# Altium PCB X1000_BB_Halley2.PcbDoc
Units mil, origin at the board's own origin, x right, y up, seen from the top; angles counter-clockwise.
Board outline 3000 x 3000 mil, 2 copper layers (Top Layer, Bottom Layer), stack 12.8 mil thick; 72 components, 102 nets, 488 pads, 0 vias.
Unrouted connection lines stored in the file: 283.
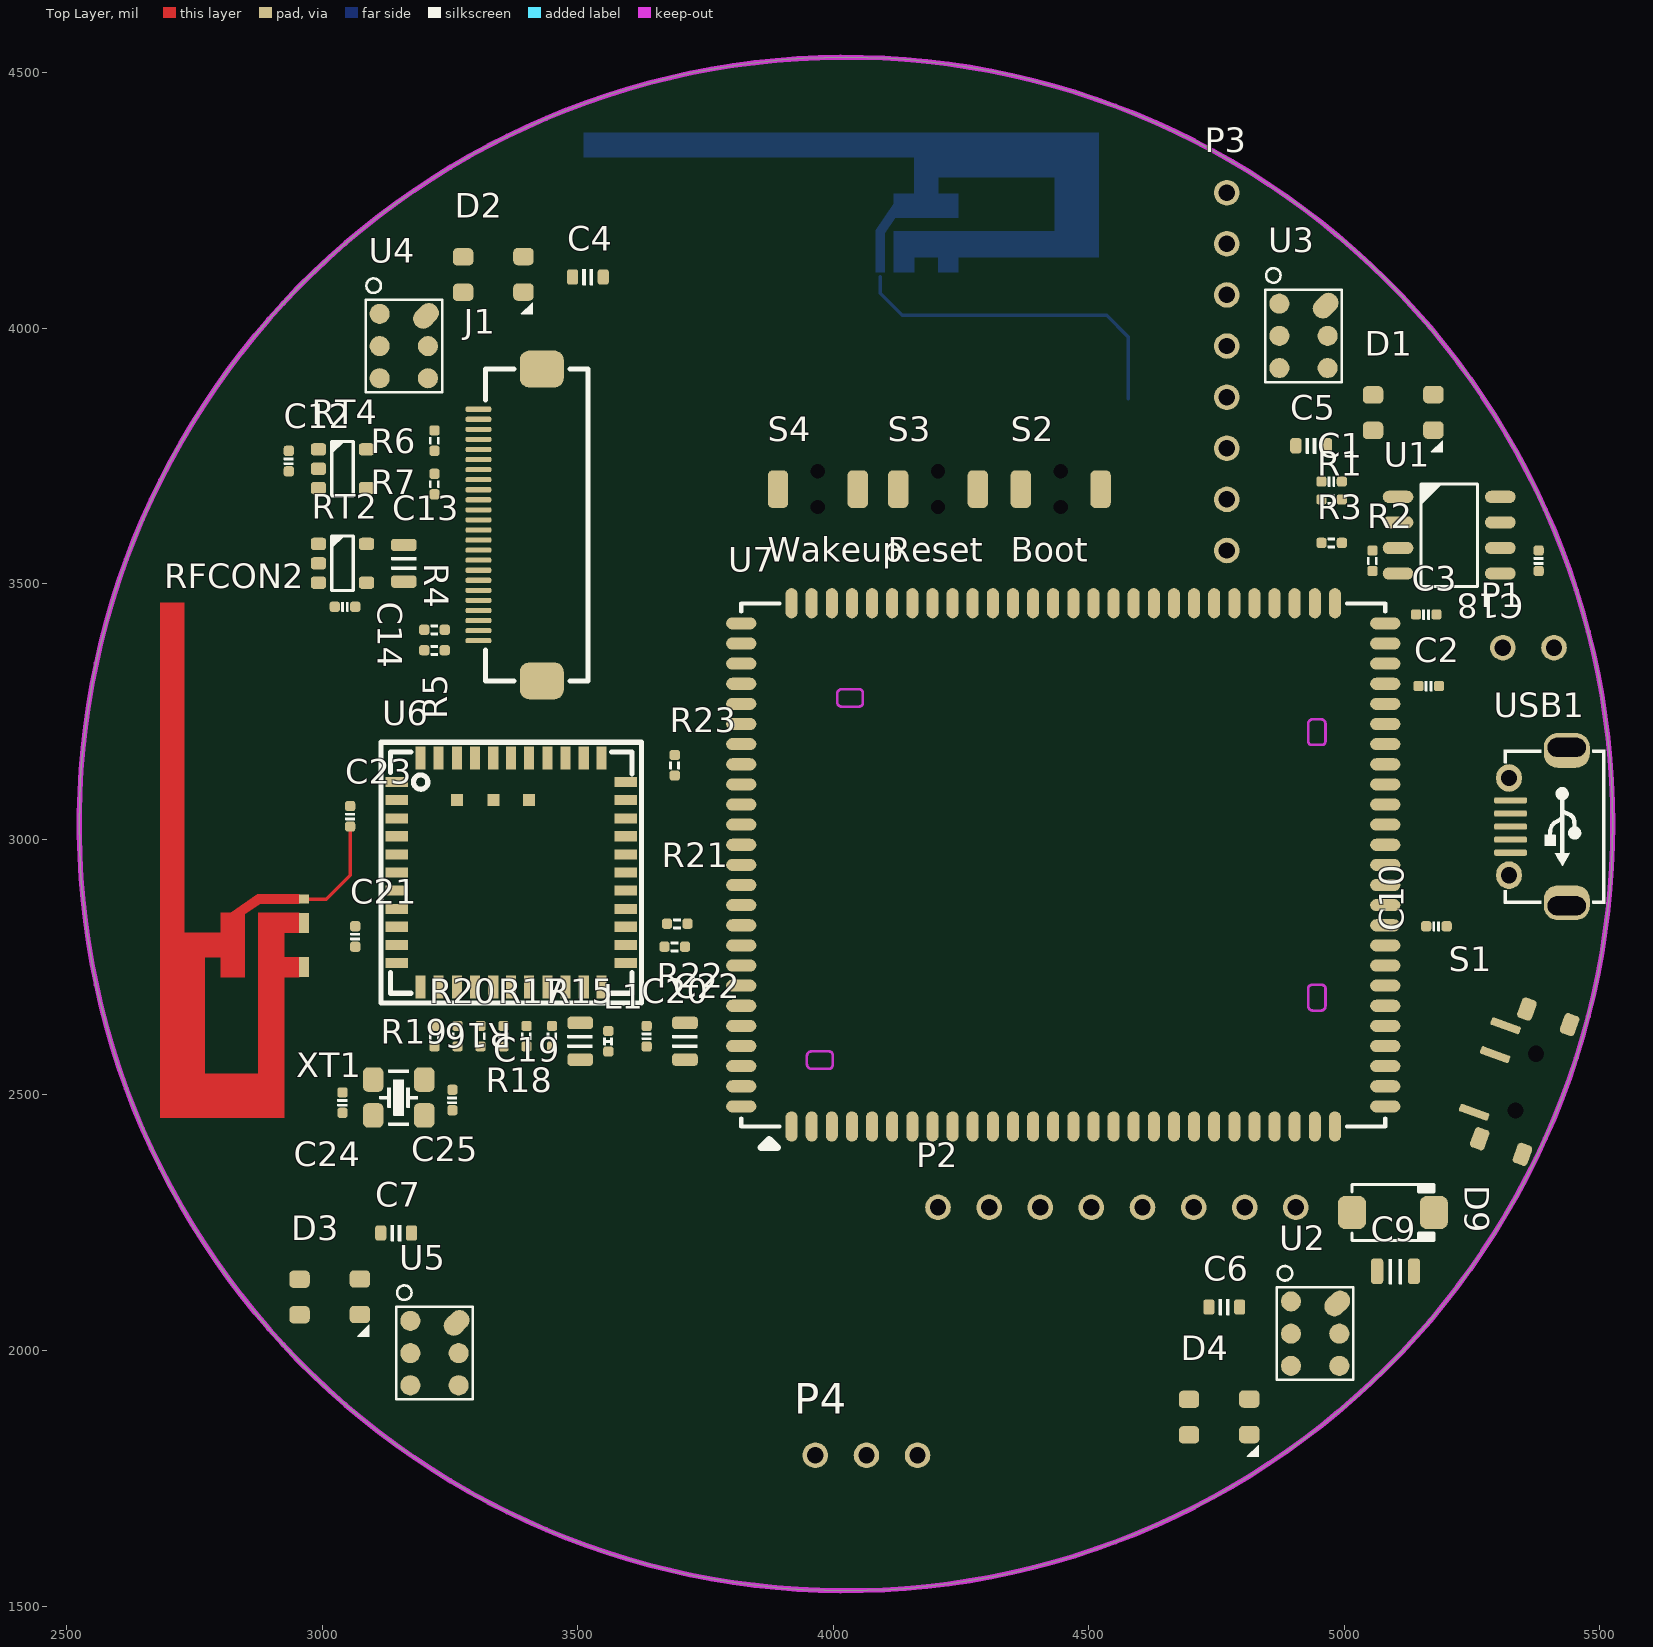
[diagram p0: Top Layer view]
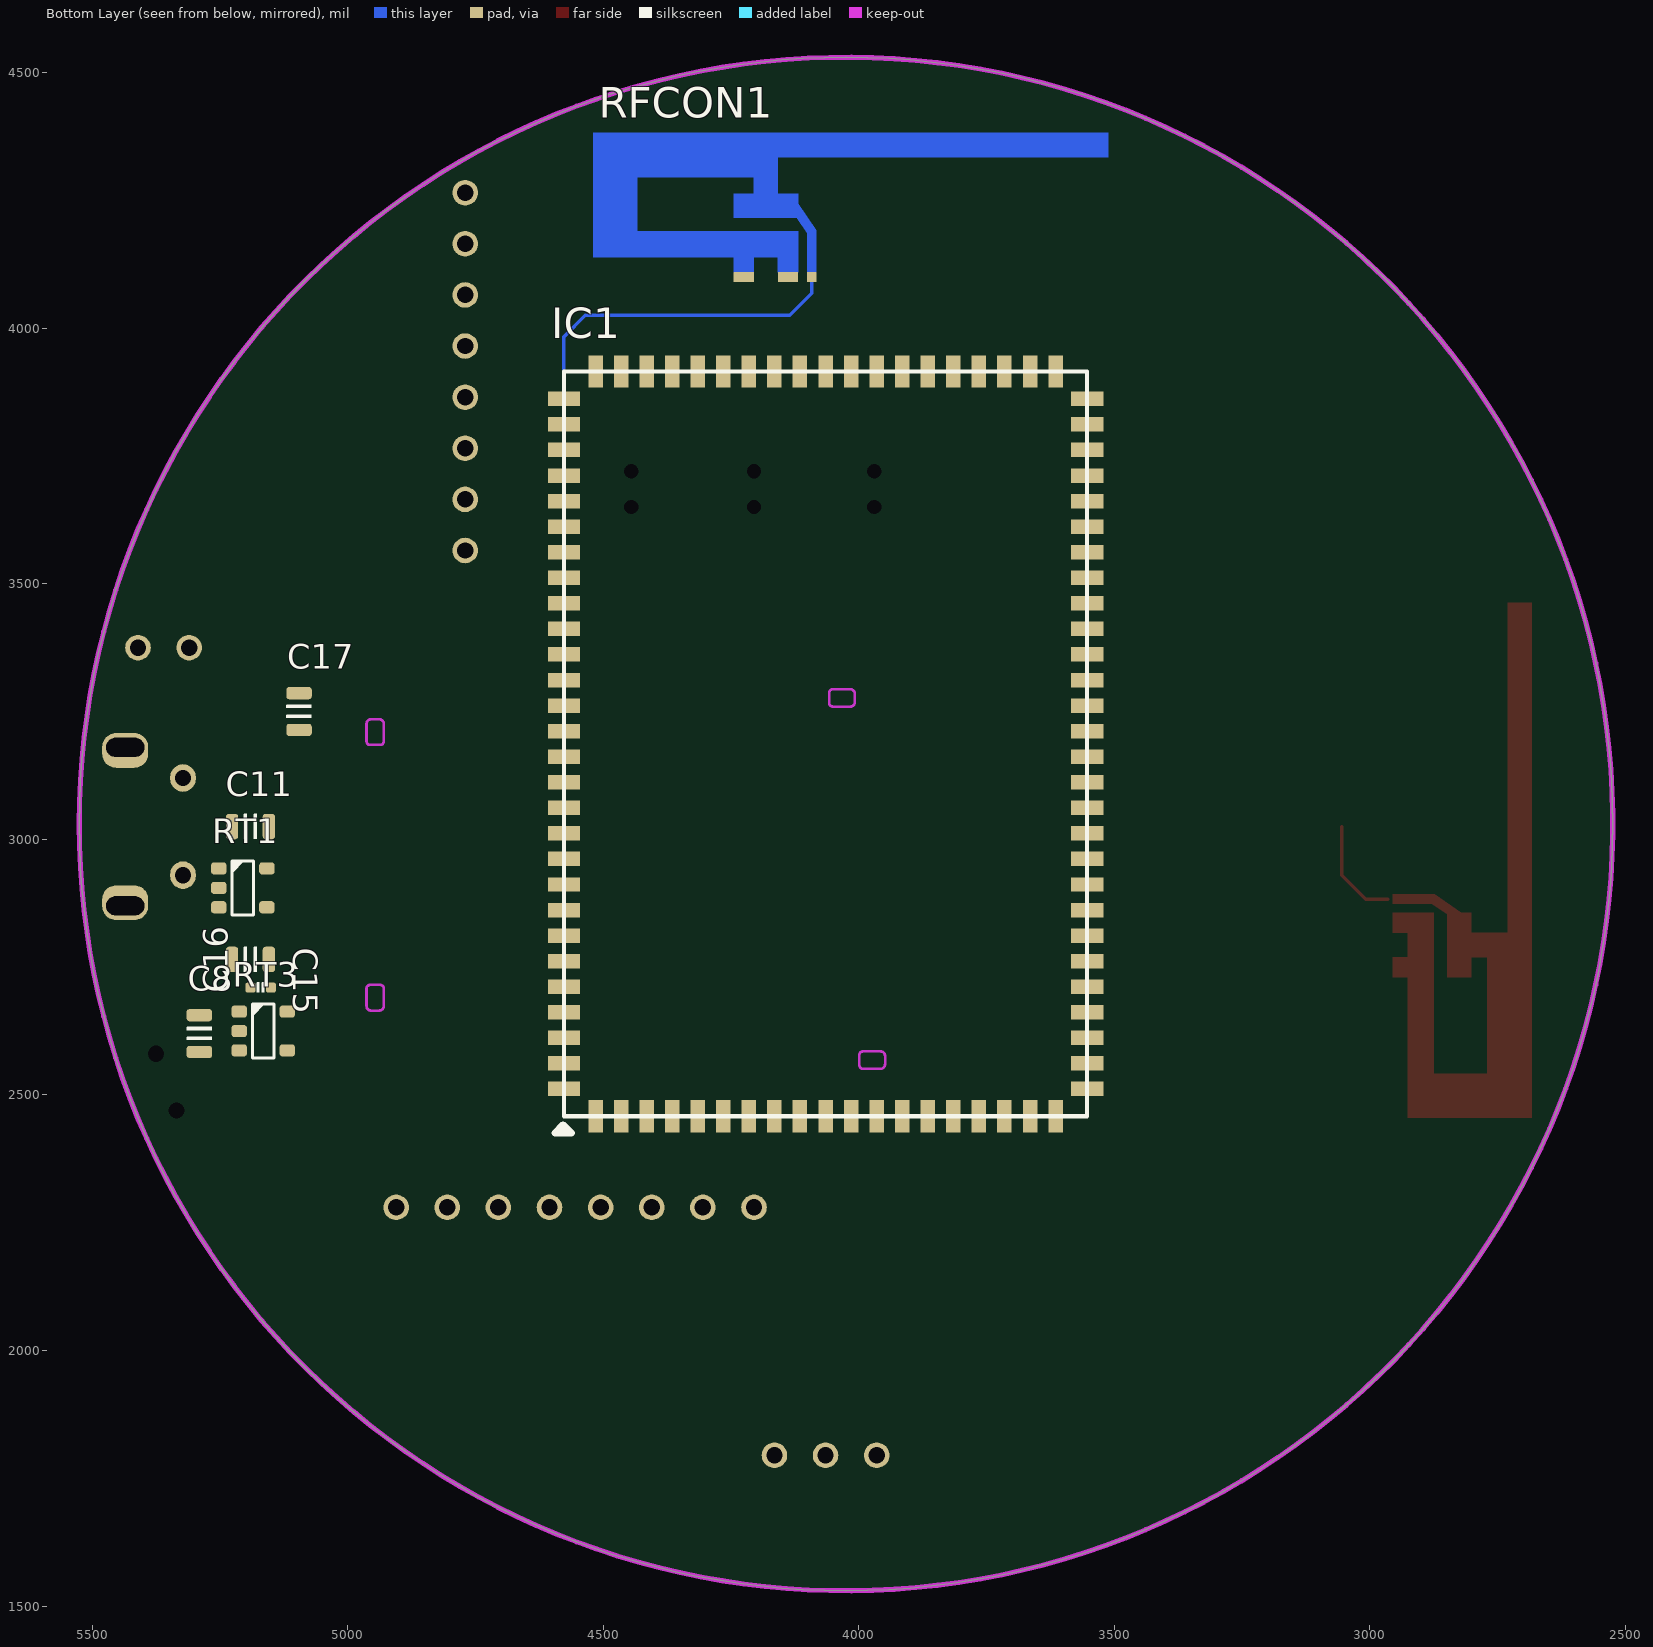
[diagram p1: Bottom Layer view, seen from below]

## Layer stack, top to bottom
Top Solder: solder mask 0.4, Solder Resist, Dk 3.5
Top Layer: signal copper 1.4
Dielectric 1: core 10, FR-4, Dk 4.2
Bottom Layer: signal copper 1.4
Bottom Solder: solder mask 0.4, Solder Resist, Dk 3.5

## Board outline
2525,3030 ccw(c4025,3030) 4025,1530 ccw(c4025,3030) 5525,3030 ccw(c4025,3030) 4025,4530 ccw(c4025,3030)

## Design rules (kind name [scope] priority, off if disabled: settings)
Clearance Clearance_1 [All] p1: gap=6 ignorepadtopadclearanceinfootprint=FALSE except(0: Arc-Hole Track-Hole SMDPad-Hole THPad-Hole Via-Hole Fill-Hole Poly-Hole Region-Hole Text-Hole)
Clearance [InComponent('RFCON1')] p2: gap=0 ignorepadtopadclearanceinfootprint=FALSE
PolygonConnect [All] p1: connectstyle=Relief reliefconductorwidth=10 reliefentries=4 polygonreliefangle="90 Angle" airgapwidth=10
RoutingVias [All] p1: holewidth=18 width=30 viastyle="Through Hole" minholewidth=18 minwidth=30 maxholewidth=18 maxwidth=30
SolderMaskExpansion [All] p1: expansion=4
Width WidthGND [InNet('GND')] p1: maxlimit=20 minlimit=6 preferedwidth=10 minimp=50.000000 maximp=50.000000 favimp=50.000000
Width WidthVCC33 [InNet('3.3V')] p2: maxlimit=20 minlimit=6 preferedwidth=10 minimp=50.000000 maximp=50.000000 favimp=50.000000
Width WidthVCC5 [InNet('5V')] p3: maxlimit=20 minlimit=6 preferedwidth=10 minimp=50.000000 maximp=50.000000 favimp=50.000000
Width WidthVCC12 [InNet('1.2V')] p4: maxlimit=20 minlimit=6 preferedwidth=10 minimp=50.000000 maximp=50.000000 favimp=50.000000
Width Width_1 [All] p5: maxlimit=10 minlimit=6 preferedwidth=7 minimp=50.000000 maximp=50.000000 favimp=50.000000
30 further rules are at their usual default settings.

## Classes and differential pairs
component class Xcore10: U7
component class WiFi_BLE2: C19 C20 C21 C22 C23 C24 C25 L1 R15 R16 R17 R18 R19 R20 R21 R22 R23 RFCON2 U6 XT1
component class USB: USB1
component class Power: C8 C9 C10 C11 C12 C13 C14 C15 C16 C17 D9 RT1 RT2 RT3 RT4 S1 S2 S3 S4
component class Port: P2 P3 P4
component class Halley2: IC1 RFCON1
component class DMIC_LED: C4 C5 C6 C7 D1 D2 D3 D4 U2 U3 U4 U5
component class Camera: J1 R4 R5 R6 R7
component class Audio: C1 C2 C3 C18 P1 R1 R2 R3 U1

## Components (designator, comment, footprint, x,y, rotation, side; value= is the part's Value field where it differs from the comment)
C1 "Cap_0402" CAP_0402 4975,3700 r0 top value=1uF
C2 "Cap_0402" CAP_0402 5165,3300 r0 top value=0.1uF
C3 "Cap_0402" CAP_0402 5160,3440 r0 top value=0.1uF
C4 "Cap_0603" CAP_0603 3520,4100 r0 top value=0.1uF
C5 "Cap_0603" CAP_0603 4935,3770 r0 top value=0.1uF
C6 "Cap_0603" CAP_0603 4765,2085 r0 top value=0.1uF
C7 "Cap_0603" CAP_0603 3145,2230 r0 top value=0.1uF
C8 "Cap_0805" CAP_0805 5290,2620 r90 bottom value=10F
C9 "Cap_0805" CAP_0805 5100,2155 r180 top value=10uF
C10 "Cap_0402" CAP_0402 5180,2830 r180 top value=1uF
C11 "Cap_0805" CAP_0805 5190,3025 r180 bottom value=?F
C12 "Cap_0402" CAP_0402 2935,3740 r90 top value=1uF
C13 "Cap_0805" CAP_0805 3160,3540 r90 top value=?F
C14 "Cap_0402" CAP_0402 3045,3455 r0 top value=1uF
C15 "Cap_0805" CAP_0805 5190,2765 r180 bottom value=?F
C16 "Cap_0402" CAP_0402 5170,2710 r0 bottom value=1uF
C17 "Cap_0805" CAP_0805 5095,3250 r90 bottom value=?F
C18 "Cap_0402" CAP_0402 5380,3545 r90 top value=1uF
C19 "Cap_0805" CAP_0805 3505,2605 r90 top value=10uF
C20 "Cap_0402" CAP_0402 3635,2615 r90 top value=0.1uF
C21 "Cap_0402" CAP_0402 3065,2810 r90 top value=0.1uF
C22 "Cap_0805" CAP_0805 3710,2605 r90 top value=10uF
C23 "Cap_0402" CAP_0402 3055,3045 r270 top value=10pF
C24 "Cap_0402" CAP_0402 3040,2485 r270 top value=22pF
C25 "Cap_0402" CAP_0402 3255,2490 r90 top value=22pF
D1 "LED_3535_SK6812" LED_3535_4P 5115,3835 r0 top
D2 "LED_3535_SK6812" LED_3535_4P 3335,4105 r0 top
D3 "LED_3535_SK6812" LED_3535_4P 3015,2105 r0 top
D4 "LED_3535_SK6812" LED_3535_4P 4755,1870 r0 top
D9 "IN4001" DO-214AC 5095,2270 r0 top value=1N4001
IC1 "Halley2" Halley2 4065,3186.65 r90 bottom
J1 "CSI_24P" FFC_0.5_24 3370,3615 r90 top
L1 "Ind_0402" IND_0402 3560,2605 r90 top value=3.3uH
P1 "Speaker" HDR1X2_2.54_180 5310,3375 r90 top
P2 "HDR1x8_2.54" HDR1X8_2.54_180 4205,2280 r90 top
P3 "HDR1x8_2.54" HDR1X8_2.54_180 4770,4265 r0 top
P4 "HDR1x3_2.54" HDR1X3_2.54_180 4165,1795 r270 top
R1 "Res_0402" RES_0402 4975,3665 r0 top value=47K
R2 "Res_0402" RES_0402 5055,3545 r270 top value=30K
R3 "Res_0402" RES_0402 4975,3580 r0 top value=30K
R4 "Res_0402" RES_0402 3220,3410 r180 top value=0R(NC)
R5 "Res_0402" RES_0402 3220,3370 r180 top value=0R(NC)
R6 "Res_0402" RES_0402 3220,3780 r270 top value=2.2K
R7 "Res_0402" RES_0402 3220,3695 r90 top value=2.2K
R15 "Res_0402" RES_0402 3450,2615 r270 top value=47K
R16 "Res_0402" RES_0402 3400,2615 r270 top value=47K
R17 "Res_0402" RES_0402 3355,2615 r270 top value=47K
R18 "Res_0402" RES_0402 3310,2615 r270 top value=47K
R19 "Res_0402" RES_0402 3265,2615 r270 top value=47K
R20 "Res_0402" RES_0402 3220,2615 r270 top value=47K
R21 "Res_0402" RES_0402 3695,2835 r0 top value=47K
R22 "Res_0402" RES_0402 3690,2790 r180 top value=47K
R23 "Res_0402" RES_0402 3690,3145 r90 top value=4.7K
RFCON1 "U.FL-R-SMT" ANTENNA_DN007N 4091.93,4100 r180 bottom
RFCON2 "U.FL-R-SMT" ANTENNA_DN007N 2965,2883.07 r90 top
RT1 "RT9103-12GB" SOT23-5 5205,2905 r180 bottom
RT2 "RT9193-15GB" SOT23-5 3040,3540 r0 top
RT3 "RT9103-33GB" SOT23-5 5165,2625 r180 bottom
RT4 "RT9193-28GB" SOT23-5 3040,3725 r0 top
S1 "SwitchSPDT_2.8x6.6_90" SwitchSPDT_2.8X6.6_90 5355,2525 r70 top
S2 "Boot" ButtonTACT_3x4x2_180H 4445,3685 r0 top
S3 "Reset" ButtonTACT_3x4x2_180H 4205,3685 r0 top
S4 "Wakeup" ButtonTACT_3x4x2_180H 3970,3685 r0 top
U1 "NS4150" SOP_E150_8 5205,3595 r0 top
U2 "MP45DT02" ST_HLGA6 4942.76,2032.99 r0 top
U3 "MP45DT02" ST_HLGA6 4920,3985 r0 top
U4 "MP45DT02" ST_HLGA6 3160,3965 r0 top
U5 "MP45DT02" ST_HLGA6 3220,1995 r0 top
U6 "AP6212A" AP6210 3370,2935 r0 top
U7 "XCORE10" CORE-32*26-1.0 4450,2950 r90 top
USB1 "USB_Micro" USB_Micro-AB 5425,3025 r270 top
XT1 "XTAL_3225_4P" XT_3225_4 3150,2495 r0 top value=26MHz

## Footprints (in the part's own frame and the unit in brackets; to place one, negate y for a bottom-side part, rotate by r counter-clockwise, add the part's x,y. Pads: shape width x height; smd on the part's side, far side on the other; paste and mask are expansions set on the pad)
ANTENNA_DN007N [mm]
  rect 0.46x0.5 smd: 1(0,0)
  rect 1x0.5 smd: 2(-1.18,0) 3(-3.38,0)
  Top Layer region: -10.86,0.99 -10.86,7.16 14.72,7.16 14.72,5.95 -1.68,5.95 -1.68,4.15 -0.68,4.15 -0.68,3.648 0.23,2.328 0.23,0.25 -0.23,0.25 -0.23,2.185 -0.751,2.94 -3.88,2.94 -3.88,4.15 -2.88,4.15 -2.88,4.95 -8.68,4.95 -8.68,2.28 -0.68,2.28 -0.68,0.25 -1.68,0.25 -1.68,0.99 -2.88,0.99 -2.88,0.25 -3.88,0.25 -3.88,0.99 -10.86,0.99
AP6210 [mil]
  rect 44.3x19.7 smd: P1(-224,177) P2(-224,142) P3(-224,106) P4(-224,71) P5(-224,35) P6(-224,0) P7(-224,-35) P8(-224,-71) P9(-224,-106) P10(-224,-142) P11(-224,-177) P23(224,-177) P24(224,-142) P25(224,-106) P26(224,-71) P27(224,-35) P28(224,0) P29(224,35) P30(224,71) P31(224,106) P32(224,142) P33(224,177)
  rect 19.7x44.3 smd: P12(-177,-224) P13(-142,-224) P14(-106,-224) P15(-71,-224) P16(-35,-224) P17(0,-224) P18(35,-224) P19(71,-224) P20(106,-224) P21(142,-224) P22(177,-224) P34(177,224) P35(142,224) P36(106,224) P37(71,224) P38(35,224) P39(0,224) P40(-35,224) P41(-71,224) P42(-106,224) P43(-142,224) P44(-177,224)
  rect 23.6x23.6 smd: TP1(-106,142) TP2(-35,142) TP3(35,142)
  silkscreen extent -255,-255 255,255
ButtonTACT_3x4x2_180H [mil]
  round 0 hole 28: 0(0,-35) 0(0,35)
  rrect50% 40x74 smd: 1(-78,0) 2(78,0)
  body extent -79,-49 79,49, height 63
CAP_0402 [mil]
  rrect50% 20x20 smd: 1(-20,0) 2(20,0)
  silkscreen extent -6,-9 6,9, body extent -20,-10 20,10, height 20
CAP_0603 [mil]
  rrect50% 22x30 smd: 1(-30,0) 2(30,0)
  silkscreen extent -10,-15 10,15, body extent -31,-16 31,16, height 31
CAP_0805 [mil]
  rrect50% 24x50 smd: 1(-36,0) 2(36,0)
  silkscreen extent -12,-24 12,24, body extent -39,-25 39,25, height 39
CORE-32*26-1.0 [mm]
  oval 1.5x0.6 smd: 1(-13,13.5) 2(-13,12.5) 3(-13,11.5) 4(-13,10.5) 5(-13,9.5) 6(-13,8.5) 7(-13,7.5) 8(-13,6.5) 9(-13,5.5) 10(-13,4.5) 11(-13,3.5) 12(-13,2.5) 13(-13,1.5) 14(-13,0.5) 15(-13,-0.5) 16(-13,-1.5) 17(-13,-2.5) 18(-13,-3.5) 19(-13,-4.5) 20(-13,-5.5) 21(-13,-6.5) 22(-13,-7.5) 23(-13,-8.5) 24(-13,-9.5) 25(-13,-10.5) 26(-13,-11.5) 27(-13,-12.5) 28(-13,-13.5) 54(13,-13.5) 55(13,-12.5) 56(13,-11.5) 57(13,-10.5) 58(13,-9.5) 59(13,-8.5) 60(13,-7.5) 61(13,-6.5) 62(13,-5.5) 63(13,-4.5) 64(13,-3.5) 65(13,-2.5) 66(13,-1.5) 67(13,-0.5) 68(13,0.5) 69(13,1.5) 70(13,2.5) 71(13,3.5) 72(13,4.5) 73(13,5.5) 74(13,6.5) 75(13,7.5) 76(13,8.5) 77(13,9.5) 78(13,10.5) 79(13,11.5) 80(13,12.5) 81(13,13.5)
  oval 0.6x1.5 smd: 29(-12,-16) 30(-11,-16) 31(-10,-16) 32(-9,-16) 33(-8,-16) 34(-7,-16) 35(-6,-16) 36(-5,-16) 37(-4,-16) 38(-3,-16) 39(-2,-16) 40(-1,-16) 41(0,-16) 42(1,-16) 43(2,-16) 44(3,-16) 45(4,-16) 46(5,-16) 47(6,-16) 48(7,-16) 49(8,-16) 50(9,-16) 51(10,-16) 52(11,-16) 53(12,-16) 82(12,16) 83(11,16) 84(10,16) 85(9,16) 86(8,16) 87(7,16) 88(6,16) 89(5,16) 90(4,16) 91(3,16) 92(2,16) 93(1,16) 94(0,16) 95(-1,16) 96(-2,16) 97(-3,16) 98(-4,16) 99(-5,16) 100(-6,16) 101(-7,16) 102(-8,16) 103(-9,16) 104(-10,16) 105(-11,16) 106(-12,16)
  Keep-Out Layer lines w0.127: -9.904,12.737 ccw(c-9.904,12.509) -10.131,12.509 -10.131,11.64 ccw(c-9.953,11.64) -9.953,11.461 -9.449,11.461 ccw(c-9.449,11.64) -9.27,11.64 -9.27,12.509 ccw(c-9.498,12.509) -9.498,12.737 -9.904,12.737 ; 8.096,11.237 ccw(c8.096,11.009) 7.869,11.009 7.869,10.14 ccw(c8.047,10.14) 8.047,9.961 8.551,9.961 ccw(c8.551,10.14) 8.73,10.14 8.73,11.009 ccw(c8.502,11.009) 8.502,11.237 8.096,11.237 ; -7.009,-12.17 ccw(c-7.009,-12.398) -7.237,-12.398 -7.237,-12.804 ccw(c-7.009,-12.804) -7.009,-13.031 -6.14,-13.031 ccw(c-6.14,-12.853) -5.961,-12.853 -5.961,-12.349 ccw(c-6.14,-12.349) -6.14,-12.17 -7.009,-12.17 ; 6.14,-12.17 ccw(c6.14,-12.349) 5.961,-12.349 5.961,-12.853 ccw(c6.14,-12.853) 6.14,-13.031 7.009,-13.031 ccw(c7.009,-12.804) 7.237,-12.804 7.237,-12.398 ccw(c7.009,-12.398) 7.009,-12.17 6.14,-12.17
  silkscreen extent -14.04,-16 13,16
DO-214AC [mil] "SMA"
  rrect50% 55x65 smd: 1(-80,0) 2(80,0)
  silkscreen extent -80,-55 80,55, body extent -98,-53 98,53, height 85
FFC_0.5_24 [mm]
  rrect50% 1.829x2.184 smd: 0(-7.747,-1.524) 0(7.747,-1.524)
  rrect50% 0.254x1.27 smd: 1(-5.75,1.625) 2(-5.25,1.625) 3(-4.75,1.625) 4(-4.25,1.625) 5(-3.75,1.625) 6(-3.25,1.625) 7(-2.75,1.625) 8(-2.25,1.625) 9(-1.75,1.625) 10(-1.25,1.625) 11(-0.75,1.625) 12(-0.25,1.625) 13(0.25,1.625) 14(0.75,1.625) 15(1.25,1.625) 16(1.75,1.625) 17(2.25,1.625) 18(2.75,1.625) 19(3.25,1.625) 20(3.75,1.625) 21(4.25,1.625) 22(4.75,1.625) 23(5.25,1.625) 24(5.75,1.625)
  silkscreen extent -7.75,-3.81 7.75,1.27, body extent -8.75,-3.93 8.75,1.41, height 2.08
Halley2 [mm]
  rect 1.6x0.72 smd: 1(-18.5,11.43) 2(-18.5,10.16) 3(-18.5,8.89) 4(-18.5,7.62) 5(-18.5,6.35) 6(-18.5,5.08) 7(-18.5,3.81) 8(-18.5,2.54) 9(-18.5,1.27) 10(-18.5,0) 11(-18.5,-1.27) 12(-18.5,-2.54) 13(-18.5,-3.81) 14(-18.5,-5.08) 15(-18.5,-6.35) 16(-18.5,-7.62) 17(-18.5,-8.89) 18(-18.5,-10.16) 19(-18.5,-11.43) 48(18.5,-11.43) 49(18.5,-10.16) 50(18.5,-8.89) 51(18.5,-7.62) 52(18.5,-6.35) 53(18.5,-5.08) 54(18.5,-3.81) 55(18.5,-2.54) 56(18.5,-1.27) 57(18.5,0) 58(18.5,1.27) 59(18.5,2.54) 60(18.5,3.81) 61(18.5,5.08) 62(18.5,6.35) 63(18.5,7.62) 64(18.5,8.89) 65(18.5,10.16) 66(18.5,11.43)
  rect 0.72x1.6 smd: 20(-17.145,-13) 21(-15.875,-13) 22(-14.605,-13) 23(-13.335,-13) 24(-12.065,-13) 25(-10.795,-13) 26(-9.525,-13) 27(-8.255,-13) 28(-6.985,-13) 29(-5.715,-13) 30(-4.445,-13) 31(-3.175,-13) 32(-1.905,-13) 33(-0.635,-13) 34(0.635,-13) 35(1.905,-13) 36(3.175,-13) 37(4.445,-13) 38(5.715,-13) 39(6.985,-13) 40(8.255,-13) 41(9.525,-13) 42(10.795,-13) 43(12.065,-13) 44(13.335,-13) 45(14.605,-13) 46(15.875,-13) 47(17.145,-13) 67(17.145,13) 68(15.875,13) 69(14.605,13) 70(13.335,13) 71(12.065,13) 72(10.795,13) 73(9.525,13) 74(8.255,13) 75(6.985,13) 76(5.715,13) 77(4.445,13) 78(3.175,13) 79(1.905,13) 80(0.635,13) 81(-0.635,13) 82(-1.905,13) 83(-3.175,13) 84(-4.445,13) 85(-5.715,13) 86(-6.985,13) 87(-8.255,13) 88(-9.525,13) 89(-10.795,13) 90(-12.065,13) 91(-13.335,13) 92(-14.605,13) 93(-15.875,13) 94(-17.145,13)
  silkscreen extent -19.33,-13 18.5,13.45
HDR1X2_2.54_180 [mil]
  round 50 hole 32: 1(0,0) 2(0,-100)
  body extent -49,-150 49,50, height 323
HDR1X3_2.54_180 [mil]
  round 50 hole 32: 1(0,0) 2(0,-100) 3(0,-200)
  body extent -49,-250 49,50, height 323
HDR1X8_2.54_180 [mil]
  round 50 hole 32: 1(0,0) 2(0,-100) 3(0,-200) 4(0,-300) 5(0,-400) 6(0,-500) 7(0,-600) 8(0,-700)
  body extent -49,-750 49,50, height 323
IND_0402 [mil]
  rrect50% 20x20 smd: 1(-20,0) 2(20,0)
  silkscreen extent -7,-9 7,9, body extent -20,-10 20,10, height 20
LED_3535_4P [mil]
  rrect50% 40x34 smd: 1(-59,34.45) 2(-59,-35) 3(59,-34.45) 4(59,35)
  silkscreen extent 55,-77 77,-55, body extent -69,-69 69,69, height 26
RES_0402 [mil]
  rrect50% 20x20 smd: 1(-20,0) 2(20,0)
  silkscreen extent -6,-10 6,10, body extent -20,-10 20,10, height 14
SOP_E150_8 [mil]
  oval 60x24 smd: 1(-100,75) 2(-100,25) 3(-100,-25) 4(-100,-75) 5(100,-75) 6(100,-25) 7(100,25) 8(100,75)
  silkscreen extent -55,-100 55,100, body extent -118,-96 118,96, height 69
SOT23-5 [mil]
  rrect50% 30x24 smd: 1(-47,38) 2(-47,0) 3(-47,-38) 4(47,-38) 5(47,38)
  silkscreen extent -21,-53 21,53, body extent -55,-57 55,57, height 57
ST_HLGA6 [mm]
  round 1 smd paste-25.4: 1(-1.2,1.6) 2(-1.2,0) 3(-1.2,-1.6) 4(1.2,-1.6) 5(1.2,0)
  oval 1x1.4 smd rot 135 paste-25.4: 6(1.1,1.5)
  silkscreen extent -1.9,-2.3 1.9,3.36
SwitchSPDT_2.8X6.6_90 [mil]
  rrect50% 42x30 smd: 0(-135,-42) 0(-135,47) 0(135,-42) 0(135,47)
  round 10 hole 31.5: 0(-59.06,0) 0(59.06,0)
  rrect50% 16x60 smd: 1(90,75) 2(30,75) 3(-90,75)
  body extent -152,-111 151,86, height 55
USB_Micro-AB [mil]
  rrect80% 68x90 hole 37 slot 75 at 90 deg copper offset 6,0 mask+0: 0(-155,10)
  oval 54x50 hole 32 mask+0: 0(-95,-103) 0(95,-103)
  rrect80% 68x90 hole 37 slot 75 at 90 deg copper offset -6,0 mask+0: 0(155,10)
  rrect50% 12x64 smd: 1(51.18,-100) 2(25.59,-100) 3(0,-100) 4(-25.59,-100) 5(-51.18,-100)
  silkscreen extent -151,-113 151,86, body extent -161,-109 161,104, height 108
XT_3225_4 [mil]
  rrect50% 40x48 smd: 1(-50,-35) 2(50,-35) 3(50,35) 4(-50,35)
  silkscreen extent -38,-54 38,54, body extent -63,-49 63,49, height 41

## Part data
C1 C2 C3 C4 C5 C6 C7 C8 C9 C10 C11 C12 C13 C14 C15 C16 C17 C18 C19 C20 C21 C22 C23 C24 C25: "Capacitor"
D1 D2 D3 D4: "LED"
D9: library part Diode_SMA, "Diode"
L1: "Inductor"
P1: library part HDR1x2_2.54, "Header"
P2 P3 P4: "Header"
R1 R2 R3 R4 R5 R6 R7 R15 R16 R17 R18 R19 R20 R21 R22 R23: "Resistor"
RFCON1 RFCON2: library part ANT_0, 1ST PART DESCRIPTION=U.FL-R-SMT
RT1 RT2 RT3 RT4: library part RT9193, "Power"
S1: "Switch"
S2 S3 S4: library part ButtonTACT_3x4x2_180, "Button"
U1: "D Class Audio Amp"
U2 U3 U4 U5: "Mic Omni-Directional -26dB 3.6V Rectangular Solder Pad", Package=None, Availability=Good, MF=STMicroelectronics, MP=MP45DT02, Price="2.57 USD"
U6: library part AP6210, BOM_Manufacturer Part=?, spicePre=U, timeStamp=1455127572
USB1: "USB"
XT1: "Crystal Oscillator"

## Nets (pads, with @x,y where several pads share a name; then routed paths per layer and width w, separated by ;. In a path a pad name is that pad's centre, name@x,y a point inside that pad or via, vN(x,y) a via of type N, cw(c..) or ccw(c..) an arc to the next point about the centre after c; other vN are vias at no path point)
1.2V: C11.2 RT1.5 U7.43 U7.44
1.5V: C13.2 J1.15 RT2.5
2.8V: C17.2 J1.21 RT4.5
3.3V: C4.2 C6.2 C7.2 C10.2 C15.2 C18.2 C20.2 C21.2 C22.2 P2.7 P3.7 R1.2 R4.2 R15.2 R16.2 R17.2 R18.2 R19.2 R20.2 R23.1 RT1.1 RT3.5 U1.6 U2.6 U3.2 U4.6 U5.2 U5.6 U6.P9 U6.P22 U7.38 U7.39 U7.40
4.3V: C9.2 D1.4 D2.4 D3.4 D4.4 D9.2
5V: C8.2 C12.2 C14.2 C16.2 D9.1 IC1.33 IC1.34 RT2.1 RT2.3 RT3.1 RT3.3 RT4.1 RT4.3 S1.2
BOOT_SELECT0: IC1.69 S2.1 U7.34
BT_REG_EN: R23.2 U6.P34 U7.104
BT_WAKE_HOST: U6.P7 U7.102
BT_XTAL_IN: C24.2 U6.P10 XT1.1
BT_XTAL_OUT: C25.2 U6.P11 XT1.3
CIM_D0: IC1.61 J1.6 U7.91
CIM_D1: IC1.62 J1.4 U7.92
CIM_D2: IC1.63 J1.3 U7.93
CIM_D3: IC1.60 J1.5 U7.94
CIM_D4: J1.7 U7.84
CIM_D5: J1.9 U7.83
CIM_D6: J1.11 U7.82
CIM_D7: J1.13 U7.81
CIM_HSYN: J1.16 U7.78
CIM_MCLK: J1.12 U7.80
CIM_PCLK: J1.8 U7.77
CIM_VSYN: J1.18 U7.79
CLK32K: IC1.2 R21.2 U7.33
CODEC_PWMN: C3.1 IC1.12 U7.51
CODEC_PWMP: C2.1 IC1.11 U7.50
DMIC0_DATA: IC1.93 U2.5 U3.5 U7.13
DMIC1_DATA: IC1.71 U4.5 U5.5 U7.29
DMIC_CLK: IC1.94 U2.4 U3.4 U4.4 U5.4 U7.30
DVP_IOVDD: J1.14
DVP_PWDN: IC1.38 J1.17 U7.75
DVP_RESET: IC1.42 J1.19 U7.76
GND: C1.1 C4.1 C5.1 C6.1 C7.1 C8.1 C9.1 C10.1 C11.1 C12.1 C13.1 C14.1 C15.1 C16.1 C17.1 C18.1 C19.2 C20.1 C21.1 C22.1 C24.1 C25.1 D1.2 D2.2 D3.2 D4.2 IC1.10 IC1.15 IC1.35 IC1.36 IC1.66 IC1.68 J1.0 J1.10 J1.23 P2.8 P3.8 P4.3 R5.2 R22.1 RFCON1.2 RFCON1.3 RFCON2.2 RFCON2.3 RT1.2 RT2.2 RT3.2 RT4.2 S2.2 S3.2 S4.2 U2.1 U2.2 U2.3 U3.1 U3.3 U4.1 U4.2 U4.3 U5.1 U5.3 U6.P1 U6.P3 U6.P20 U6.P31 U6.P33 U6.P36 U7.41 U7.42 U7.95 U7.96 USB1.0 USB1.5 XT1.2 XT1.4
HOST_WAKE_BT: U6.P6 U7.103
LED_Red: IC1.78 U7.18
MSC0_CLK: IC1.54 U7.87
MSC0_CMD: IC1.55 U7.88
MSC0_D0: IC1.53 U7.86
MSC0_D1: IC1.52 U7.85
MSC0_D2: IC1.51 U7.90
MSC0_D3: IC1.50 U7.89
MSC1_CLK: R17.1 U6.P17 U7.8
MSC1_CMD: R18.1 U6.P16 U7.9
MSC1_D0: R16.1 U6.P18 U7.7
MSC1_D1: R15.1 U6.P19 U7.6
MSC1_D2: R20.1 U6.P14 U7.11
MSC1_D3: R19.1 U6.P15 U7.10
NetC1_2: C1.2 U1.2
NetC2_2: C2.2 R2.2
NetC3_2: C3.2 R3.2
NetC19_1: C19.1 L1.1 U6.P23
NetC23_1: C23.1 U6.P2
NetC23_2: C23.2 RFCON2.1 | length 204.4
  Top Layer w7: RFCON2.1 3008.07,2883.07 3055,2930 C23.2
NetD1_1: D1.1 D2.3
NetD2_1: D2.1 D3.3
NetD3_1: D3.1 D4.3
NetJ1_1: J1.1 R5.1
NetJ1_2: J1.2 R4.1
NetL1_2: L1.2 U6.P21
NetP1_1: P1.1 U1.5
NetP1_2: P1.2 U1.8
NetR1_1: R1.1 U1.1
NetR2_1: R2.1 U1.3
NetR3_1: R3.1 U1.4
NetR21_1: R21.1 R22.2 U6.P24
OTG_DM: IC1.5 U7.47 USB1.2
OTG_DP: IC1.6 U7.48 USB1.3
OTG_ID: IC1.4 U7.46
OTG_VBUS: IC1.16 S1.1 U7.49 USB1.1
PCM_CLK: U6.P26 U7.4
PCM_DI: U6.P25 U7.5
PCM_DO: U6.P27 U7.2
PCM_SYN: U6.P28 U7.3
PWR_ON: RT1.3 U7.37
RESET_N: IC1.1 S3.1 U7.36
RF_IN: IC1.67 RFCON1.1 | length 673.5
  Bottom Layer w7: RFCON1.1 4091.93,4068.07 4135,4025 4535,4025 4576.81,3983.19 IC1.67
SDCARD_CD: IC1.80 U7.19
SMB0_SCL: IC1.75 J1.20 R7.1 U7.15
SMB0_SDA: IC1.74 J1.22 R6.1 U7.14
SMB1_SCL/PA00: IC1.29 P3.6 U7.69
SMB1_SCL/PWM1/PC26: IC1.77 P2.2 U7.17
SMB1_SDA/PA01: IC1.28 P3.5 U7.70
SMB1_SDA/PWM2/PC27: IC1.76 P2.1 U7.16
SSI0_CE0: IC1.87 P2.6 U7.23
SSI0_CLK: IC1.86 P2.5 U7.22
SSI0_DR: IC1.85 P2.4 U7.21
SSI0_DT: D1.3 IC1.84 P2.3 U7.20
UART0_CTS_N: U6.P44 U7.100
UART0_RTS_N: U6.P41 U7.99
UART0_RXD: U6.P42 U7.98
UART0_TXD: U6.P43 U7.97
UART1_RXD/PA04: IC1.37 P3.2 U7.73
UART1_TXD/PA05: IC1.41 P3.1 U7.74
UART2_RXD: IC1.72 IC1.83 P4.1 U7.31
UART2_RXD/PA02: IC1.32 P3.4 U7.71
UART2_TXD: IC1.73 IC1.82 P4.2 U7.32
UART2_TXD/PA03: IC1.31 P3.3 U7.72
VCC: R6.2 R7.2
VCC3.3V: C5.2 U3.6
WAKE_UP: IC1.65 S4.1 U7.35
WL_REG_EN: U6.P12 U7.105
WL_WAKE_HOST: U6.P13 U7.106
pads on no net: D4.1 IC1.3 IC1.7 IC1.8 IC1.9 IC1.13 IC1.14 IC1.17 IC1.18 IC1.19 IC1.20 IC1.21 IC1.22 IC1.23 IC1.24 IC1.25 IC1.26 IC1.27 IC1.30 IC1.39 IC1.40 IC1.43 IC1.44 IC1.45 IC1.46 IC1.47 IC1.48 IC1.49 IC1.56 IC1.57 IC1.58 IC1.59 IC1.64 IC1.70 IC1.79 IC1.81 IC1.88 IC1.89 IC1.90 IC1.91 IC1.92 J1.24 RT1.4 RT2.4 RT3.4 RT4.4 S1.0 S1.3 S2.0 S3.0 S4.0 U1.7 U6.P4 U6.P5 U6.P8 U6.P29 U6.P30 U6.P32 U6.P35 U6.P37 U6.P38 U6.P39 U6.P40 U6.TP1 U6.TP2 U6.TP3 U7.1 U7.12 U7.24 U7.25 U7.26 U7.27 U7.28 U7.45 U7.52 U7.53 U7.54 U7.55 U7.56 U7.57 U7.58 U7.59 U7.60 U7.61 U7.62 U7.63 U7.64 U7.65 U7.66 U7.67 U7.68 U7.101 USB1.4

## Keep-outs
Keep-Out Layer:
  circle w10: c4025,3030 r1500

## Text inside footprints (layer, text, board x,y; h text height)
RFCON1: Mechanical 11 "3" at 4228.15,4100 h7.87; Mechanical 11 "2" at 4141.54,4100 h7.87; Mechanical 11 "1" at 4095.08,4100 h7.87; Mechanical 16 "2011-09-19" at 4511.02,4145.55 h7.87; Mechanical 16 "ROBERT MITAL" at 4511.02,4175.08 h7.87; Mechanical 16 "MICHAL BLACHUCKI" at 4511.02,4159.33 h7.87
RFCON2: Mechanical 11 "3" at 2965,2746.85 h7.87 r90; Mechanical 11 "2" at 2965,2833.46 h7.87 r90; Mechanical 11 "1" at 2965,2879.92 h7.87 r90; Mechanical 16 "2011-09-19" at 2919.45,2463.98 h7.87 r90; Mechanical 16 "ROBERT MITAL" at 2889.92,2463.98 h7.87 r90; Mechanical 16 "MICHAL BLACHUCKI" at 2905.67,2463.98 h7.87 r90